# Altium PCB uku20710_com (1).PcbDoc (part 3 of 4)
Units mm, origin at the board's own origin, x right, y up, seen from the top; angles counter-clockwise.
Board outline 354.7 x 156.7 mm, 2 copper layers (Top Layer, Bottom Layer); 275 components, 514 nets, 980 pads, 578 vias.
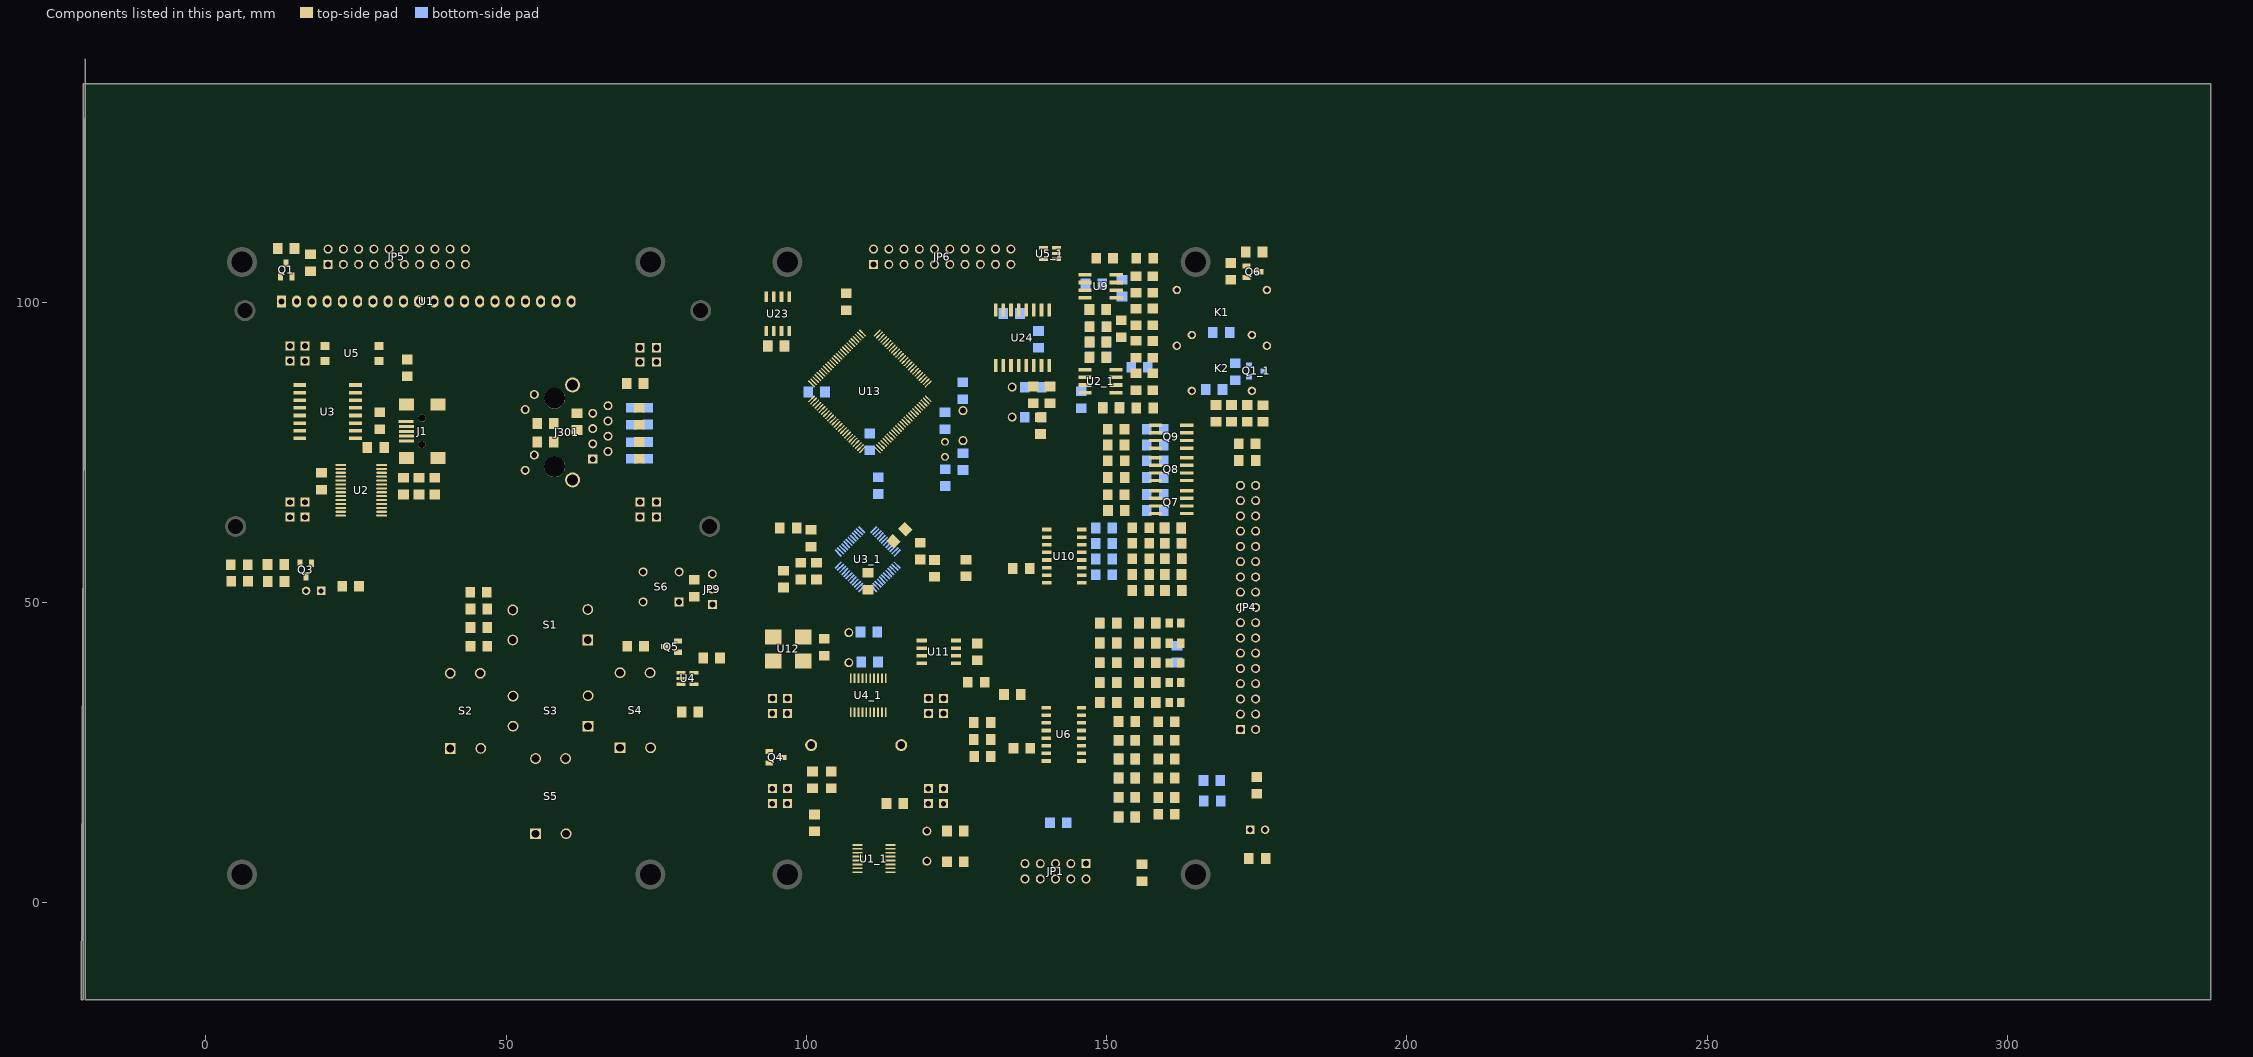
[diagram p3: the components of this part, seen from the top]

## Via types
v1: diameter 1.1, hole 0.6, Top Layer to Bottom Layer, 491 vias
v2: diameter 1.2, hole 0.7, Top Layer to Bottom Layer, 63 vias
v3: diameter 1.5, hole 1, Top Layer to Bottom Layer, 20 vias
v4: diameter 1.27, hole 0.7, Top Layer to Bottom Layer, 3 vias
v5: diameter 1.2, hole 0.6, Top Layer to Bottom Layer, 1 vias

## Nets (pads, with @x,y where several pads share a name; then routed paths per layer and width w, separated by ;. In a path a pad name is that pad's centre, name@x,y a point inside that pad or via, vN(x,y) a via of type N, cw(c..) or ccw(c..) an arc to the next point about the centre after c; other vN are vias at no path point) (continued)
copper on no net: | length 7030.1
  Top Layer w0.25: 93.319,95.201 93.319,96.997 v1(93.348,97.025) ; v2(93.598,27.958) 94.098,28.458 102.95,28.458 103.85,27.558 109.852,27.558 111.277,28.983 111.277,31.71 ; 94.322,34.001 94.322,34.534 95.248,35.46 104.45,35.46 v2(104.55,35.36) ; v2(94.348,65.618) 101.8,65.618 102.85,66.668 117.053,66.668 122.19,61.531 136.676,61.531 141.012,65.868 146.561,65.868 v1(146.811,66.118) ; v2(94.398,81.722) 98.66,81.722 100.852,83.914 ; 94.474,40.261 94.498,40.237 v1(94.498,38.261) ; 94.589,95.201 94.589,98.768 v1(94.698,98.876) ; v1(94.998,80.321) 95.248,80.321 95.798,80.871 98.517,80.871 101.205,83.56 ; v2(95.248,66.768) 95.848,66.168 101.6,66.168 102.65,67.218 117.304,67.218 122.51,62.011 136.477,62.011 141.584,67.118 v1(145.911,67.118) ; v1(95.425,48.999) 96.313,49.887 108.733,49.887 109.651,48.969 110.857,48.969 111.775,49.887 119.302,49.887 119.852,49.337 120.602,49.337 v1(121.602,50.337) ; v1@95.425,50.349 108.378,50.343 ; v1(95.598,64.567) 96.148,65.117 101.049,65.117 102.08,64.087 104.48,64.087 105.251,63.317 107.001,63.317 v1(107.451,63.767) ; v2(95.598,68.268) 96.248,67.618 96.248,67.068 96.598,66.718 101.45,66.718 102.45,67.718 117.504,67.718 122.731,62.491 136.114,62.491 139.759,66.136 139.759,67.618 140.359,68.218 v1(144.911,68.218) ; 95.859,100.901 95.859,99.691 96.248,99.302 v1@96.248,98.951 ; 96.196,55.149 v1(103.39,55.149) v1@103.402,55.137 ; v1(96.298,78.271) 97.365,78.271 101.912,82.818 ; v1(96.448,79.721) 98.073,79.721 101.559,83.207 ; 96.822,34.001 102.892,34.001 v2(103.35,34.46) ; v1(96.825,48.949) 97.313,49.437 108.575,49.437 109.472,48.539 111.035,48.539 111.933,49.437 119.102,49.437 119.702,48.837 121.502,48.837 v1(122.952,50.287) ; v1(96.948,76.97) 96.948,77.17 97.037,77.259 97.037,77.27 98.374,78.608 102.266,82.5 ; v2(97.098,69.819) 97.098,69.218 98.599,67.718 101.049,67.718 102.05,68.718 117.904,68.718 123.171,63.451 135.274,63.451 138.409,66.586 138.409,69.168 139.659,70.419 145.661,70.419 148.011,68.068 148.011,66.668 149.378,65.301 150.224,65.301 ; v2(97.198,67.768) 97.749,67.218 101.25,67.218 102.25,68.218 117.754,68.218 123.001,62.971 135.694,62.971 139.109,66.386 139.109,68.818 139.709,69.418 v1(143.91,69.418) ; v1(98.099,75.42) 98.793,75.42 101.624,78.251 103.674,78.251 105.094,79.671 ; v1(98.149,99.151) 98.424,98.875 98.424,97.471 99.544,96.351 100.082,96.351 105.448,90.985 ; v2(98.499,69.318) 99.399,68.418 100.949,68.418 101.75,69.218 118.154,69.218 123.321,64.051 134.894,64.051 136.575,65.733 137.811,66.968 137.811,69.371 139.459,71.019 145.911,71.019 148.985,67.945 150.162,67.945 ; v1(98.499,77.371) 98.499,78.025 102.62,82.146 ; v1(98.776,48.499) 99.241,48.963 108.401,48.963 109.264,48.101 v1(123.224,48.101) ; v1(99.049,74.47) 100.268,73.251 102.21,73.251 106.862,77.903 ; 99.059,53.824 99.059,53.48 100.252,52.287 ; 99.059,56.624 100.75,56.624 101.659,56.624 104.489,56.624 104.502,56.637 ; v1(99.199,73.069) 99.517,72.751 102.452,72.751 107.216,77.514 ; v1(99.199,100.151) 99.224,97.626 99.824,97.025 100.114,97.025 105.801,91.338 ; v1(100.399,98.126) 100.399,97.448 106.155,91.692 ; v1(100.724,78.851) 100.724,79.201 101.774,80.251 102.624,80.251 103.324,79.551 103.56,79.551 104.387,80.378 ; 100.724,88.638 101.912,87.449 102.649,86.713 102.649,85.251 102.849,85.051 ; v1@101.2,71.769 101.682,72.251 102.624,72.251 107.569,77.196 ; v1(101.374,74.151) 102.403,74.151 106.509,78.257 ; v1(101.374,76.251) 101.474,76.351 103.189,76.351 105.801,78.964 ; 101.702,59.306 101.702,59.337 ; v1(102.174,75.201) 102.746,75.201 106.155,78.61 ; v1(102.174,77.351) 103.482,77.351 105.448,79.318 ; v1(102.174,79.151) 102.424,78.901 103.617,78.901 104.741,80.025 ; 102.266,87.803 103.768,86.301 103.774,86.301 103.925,86.151 v1(104.8,86.151) ; v1(102.3,97.125) 102.3,96.502 105.451,93.351 105.91,93.351 106.862,92.399 ; v1(102.45,64.967) 102.8,64.617 104.15,64.617 105.15,65.618 106.07,65.618 106.251,65.437 v1@114.653,65.437 ; v1@102.5,71.069 102.9,71.469 103.85,71.469 104.25,71.069 105.15,71.069 105.668,70.551 117.574,70.551 123.074,65.051 v1(123.824,65.051) ; v1(102.95,70.119) v1(104.75,70.119) ; 103.327,81.439 104.099,82.211 104.099,83.251 ; v1(103.452,65.787) 103.852,66.187 ; 103.68,81.085 105.246,82.651 v1(105.274,82.651) ; v1@103.814,66.149 116.823,66.149 121.955,61.016 136.84,61.016 140.691,64.867 v1@143.96,64.867 ; v1@104.95,71.919 105.868,71.001 117.871,71.001 120.454,68.418 v2(121.155,68.418) ; v1@105,73.319 106.819,71.501 118.174,71.501 120.307,69.368 121.655,69.368 122.174,68.849 v1(122.174,67.301) ; v1(105.551,64.567) 105.851,64.867 113.853,64.867 114.453,64.267 115.653,64.267 v1@115.903,64.517 ; v1(106.501,47.663) 107.617,46.547 119.72,46.547 v1(120.154,46.113) ; 106.7,98.725 106.874,98.55 v1(106.874,96.901) 106.824,96.851 106.824,95.972 108.63,94.167 ; 106.7,101.576 106.65,101.576 106.602,101.528 105.249,100.175 105.249,96.84 108.276,93.813 109.674,92.415 v1(109.674,92.401) ; 107.051,39.969 108.027,38.993 108.027,37.41 ; 107.051,44.969 108.677,43.343 108.677,37.41 ; 107.923,76.843 108.801,77.721 108.801,79.571 v1(108.451,79.921) ; 107.923,93.46 108.55,92.832 108.55,91.373 ; v1(108.001,47.663) 108.501,47.163 121.605,47.163 v1(121.905,46.863) ; 108.276,76.489 109.007,77.219 110.25,77.219 110.624,77.593 110.624,77.619 ; 108.378,50.349 108.878,50.349 109.829,49.399 110.679,49.399 111.629,50.349 112.029,50.349 ; 108.63,76.136 107.501,75.007 107.501,72.769 108.301,71.969 118.354,71.969 120.504,69.819 121.897,69.819 123.105,68.61 v1(123.105,66.318) ; 108.983,75.782 108.051,74.85 108.051,72.969 108.551,72.469 118.604,72.469 120.806,70.268 122.056,70.268 123.755,68.568 123.755,67.068 125.156,65.668 v1(125.156,64.967) ; 110.246,52.149 110.279,52.116 v1@110.279,50.449 ; v1@110.628,102.176 v1(110.578,102.176) 112.978,99.775 113.729,99.775 114.639,98.865 114.639,94.166 113.58,93.106 ; v1(111.478,98.775) 111.928,99.225 113.479,99.225 113.923,98.78 114.179,98.525 114.179,94.374 113.929,94.124 ; 111.812,94.874 111.812,97.208 v1(111.828,97.224) ; v1@111.874,101.951 v1@111.874,102.101 ; 111.927,31.71 111.928,31.711 111.928,33.158 112.728,33.959 116.479,33.959 118.48,35.959 124.381,35.959 125.532,34.809 v1(128.482,34.809) ; v1(111.951,102.376) 111.951,101.603 113.279,100.275 114.029,100.275 115.069,99.235 115.069,93.914 114.529,93.374 ; 112.029,50.341 v1(120.252,50.337) ; 112.165,94.52 113.103,95.457 v1@113.103,96.025 ; 112.577,37.41 112.577,36.361 112.778,36.159 v1(115.979,36.159) ; 112.873,93.813 113.679,94.619 113.679,97.575 v1(112.978,98.275) ; v1(113.024,90.451) 113.046,90.451 114.64,92.045 ; 113.226,93.46 113.909,94.143 ; 113.227,37.41 113.328,37.51 v1(116.853,37.51) ; v1@113.324,101.901 115.499,99.726 115.499,93.594 115.179,93.273 ; 113.624,79.92 114.391,79.92 115.347,78.964 ; v1@113.702,63.887 113.702,63.087 116.84,59.949 118.946,59.949 ; 113.933,77.55 118.008,73.475 118.476,73.007 118.819,73.007 121.128,70.698 122.234,70.698 122.283,70.649 124.185,68.746 124.185,68.69 124.274,68.601 124.274,67.301 125.474,66.101 126.774,66.101 127.874,65.001 v1(133.924,65.001) ; 113.933,92.753 114.542,93.361 ; v1@114.029,13.103 v1(114.079,13.103) ; 114.124,92.251 114.28,92.406 ; 114.201,89.623 114.201,90.899 114.994,91.692 ; 114.287,77.903 118.212,73.978 ; 114.287,92.399 115.17,93.282 ; v1(114.524,81.201) 116.055,79.671 ; 114.64,78.257 119.03,73.867 119.315,73.867 121.583,71.599 122.727,71.599 125.224,69.101 125.224,67.701 125.874,67.051 127.274,67.051 128.174,66.151 132.674,66.151 133.224,66.701 v1@134.274,66.701 ; v1(114.774,102.151) 114.774,101.28 115.733,100.321 115.929,100.125 115.929,91.923 115.529,91.523 ; v1(114.779,32.958) 116.379,32.958 118.88,35.459 124.181,35.459 125.332,34.309 127.232,34.309 v1@128.182,33.358 ; 114.994,78.61 119.308,74.297 119.493,74.297 121.721,72.069 123.006,72.069 125.724,69.351 125.724,67.901 126.024,67.601 127.474,67.601 128.424,66.651 132.374,66.651 133.574,67.851 135.274,67.851 v1(136.074,68.651) ; 115.347,91.338 115.531,91.522 ; 115.701,79.318 116.524,78.494 116.524,78.301 115.924,77.701 ; 115.824,81.971 115.824,81.316 116.616,80.523 116.762,80.378 118.853,78.287 118.853,77.519 ; v1@115.879,39.857 119.205,39.857 ; v1(116.024,86.923) 116.574,86.373 118.867,86.373 119.59,87.096 ; v1(116.879,96.474) 117.33,96.924 119.23,96.924 119.474,96.68 119.474,92.637 ; v1(116.903,43.662) 116.908,43.667 119.205,43.667 ; 117.024,87.573 117.324,87.273 117.646,87.273 118.529,88.156 ; 117.115,80.732 121.524,76.322 121.524,75.701 122.976,74.25 123.074,74.25 123.079,74.25 ; 117.469,81.085 122.024,76.53 122.024,75.951 122.524,75.451 123.374,75.451 124.124,74.701 124.124,74.101 126.337,71.889 127.207,71.019 129.939,71.019 131.14,69.819 v1(131.957,69.819) ; 117.822,81.439 122.511,76.75 123.074,76.75 123.079,76.75 ; 118.176,81.792 122.148,77.821 123.505,77.821 124.074,77.251 124.074,75.401 124.976,74.5 126.557,72.918 v1(127.932,72.918) ; 118.204,73.97 118.737,73.437 119.137,73.437 121.405,71.169 122.407,71.169 124.724,68.851 124.724,67.501 125.674,66.551 127.024,66.551 127.974,65.601 133.024,65.601 133.424,66.001 134.274,66.001 134.424,65.851 135.474,65.851 v1@135.974,66.351 ; v1@118.324,98.751 118.874,98.751 119.174,98.451 ; 118.529,82.146 122.405,78.271 123.755,78.271 124.505,77.521 124.505,75.77 125.557,74.719 127.832,74.719 v1(128.032,74.519) ; 118.794,108.841 120.074,107.561 120.074,101.151 122.574,98.651 v1@122.574,91.251 ; 118.883,82.5 122.631,78.751 124.024,78.751 124.974,77.801 124.974,76.001 125.474,75.501 v1(142.474,75.501) ; 119.237,82.853 122.838,79.251 124.274,79.251 126.075,77.451 126.075,76.943 ; 119.237,87.449 121.438,89.651 124.074,89.651 v1(124.374,89.951) ; 119.59,83.207 120.853,81.943 126.075,81.943 ; 119.944,86.742 119.254,86.053 119.254,85.573 119.504,85.323 120.404,85.323 123.155,88.073 v1(123.155,88.173) ; 120.297,83.914 120.346,83.914 124.806,88.373 124.806,88.422 125.704,88.422 v1(126.605,89.322) ; 120.297,86.389 122.103,88.195 122.103,88.922 122.254,89.072 124.804,89.072 125.304,89.573 125.304,89.823 126.355,90.873 126.705,90.873 v1@126.905,90.873 ; 121.334,106.301 121.334,101.172 v1(122.281,100.225) ; v1@123.581,96.874 123.924,96.874 124.474,97.425 124.474,100.382 122.974,101.882 122.974,102.819 126.435,106.28 126.482,106.327 ; v1@123.774,95.251 123.799,95.276 125.074,96.551 125.074,96.651 ; v1(124.624,54.351) 124.637,54.339 126.562,54.339 126.881,54.339 ; v1(124.974,94.351) 125.674,95.051 125.674,95.851 ; v1(126.682,70.018) 127.232,69.467 130.783,69.467 131.833,68.417 v1(131.833,67.917) ; v1(126.932,68.567) 130.233,68.567 v1(130.533,68.267) ; v1(127.824,98.801) 127.824,92.601 127.71,92.486 127.71,92.385 127.674,92.349 127.674,78.801 128.324,78.151 v1@128.624,78.151 ; v1(128.474,100.051) 128.774,99.751 128.774,97.951 128.474,97.651 128.474,92.451 128.174,92.151 128.174,80.001 v1(128.624,79.551) ; v1(129.124,91.301) 129.124,80.601 v1(130.574,79.151) ; v2(129.207,45.801) v2@129.307,45.801 ; v1(129.274,58.451) 130.624,59.801 v1@138.274,59.801 ; v2@129.318,45.813 130.407,45.813 ; v1(130.274,5.301) 133.809,5.301 133.908,5.202 140.24,5.202 141.481,3.961 ; 130.407,45.801 136.774,45.801 137.174,46.201 139.824,46.201 139.974,46.051 v1@143.76,46.051 ; v1(130.557,101.927) 130.174,101.544 130.174,94.324 131.529,92.969 131.529,89.426 ; v1(131.324,87.051) 131.324,81.651 v1(132.374,80.601) ; v1@131.774,69.801 134.366,69.801 134.613,70.047 136.856,70.047 138.731,71.922 ; v1(132.624,101.877) 132.799,101.701 132.799,98.676 132.799,96.633 v1(133.258,96.175) ; 132.774,98.676 132.774,99.201 ; v1@133.891,68.851 v1(134.024,68.851) 134.791,69.617 137.185,69.617 139.335,71.768 v1@140.836,71.768 ; v1(135.258,94.725) 135.324,94.725 135.339,94.709 135.339,89.426 ; 135.339,98.676 135.339,102.458 v1(135.608,102.727) ; v1(135.724,57.766) 136.758,57.766 137.859,58.866 138.709,58.866 139.459,59.616 139.959,59.616 ; 135.784,34.709 135.758,33.509 v1(136.558,32.709) 139.319,29.949 139.954,29.949 ; v1(136.408,95.825) 136.609,95.624 136.609,89.426 ; 138.735,71.918 139.834,73.018 141.587,73.018 142.085,72.519 v1(143.01,72.519) ; 139.954,31.219 139.972,31.201 141.702,31.201 v1@141.76,31.259 ; 139.954,32.489 139.954,33.481 v1@139.974,33.501 ; 139.999,54.526 141.698,54.526 v1(141.724,54.5) ; 139.999,62.146 140.609,62.756 v1(140.609,63.217) ; v1(142.674,90.851) 142.674,80.451 141.874,79.651 141.874,78.101 142.524,77.451 v1(144.024,77.451) ; v1(142.91,55.815) 142.929,55.796 145.849,55.796 ; v1(143.924,73.701) 150.105,73.701 150.212,73.595 ; v1(145.674,78.901) 147.005,77.571 148.962,77.571 150.162,78.771 150.162,78.845 ; 145.849,53.256 151.07,53.256 v1(152.362,51.964) ; v1(146.774,76.351) 150.056,76.351 ; v1(147.711,78.921) 149.112,80.321 153.163,80.321 ; v1(147.724,31.601) 153.971,31.601 154.763,30.809 154.763,30.259 154.82,30.201 154.877,30.145 158.562,30.145 158.564,30.146 158.564,30.159 ; 150.162,78.851 150.174,78.851 ; 153.163,80.301 158.974,80.301 160.563,81.89 160.563,83.121 ; 154.324,30.051 154.779,30.051 ; v1(159.924,86.551) 159.924,85.212 160.664,84.472 160.664,83.222 160.563,83.121 ; 160.563,83.171 160.563,83.121
  Top Layer w0.3: v2(93.298,85.072) 98.999,90.774 98.999,95.725 97.129,97.595 97.129,100.901 ; v2(93.748,83.572) 94.698,84.522 94.698,85.573 99.599,90.474 99.599,94.378 100.827,95.606 ; 93.774,25.106 96.024,27.357 v1(97.124,27.357) ; v2(93.798,36.36) 105.651,36.36 v2(105.751,36.46) ; v2(94.898,29.408) 110.252,29.408 110.627,29.783 110.627,31.71 ; v1@97.124,98.226 v1@97.129,98.231 ; v1(97.776,59.651) 98.811,60.687 v1(103.152,60.687) ; v1(97.825,21.855) 97.825,21.805 97.862,21.843 104.133,21.843 ; 98.376,62.352 98.376,62.402 98.376,62.802 v1(99.676,64.103) ; 99.059,53.824 99.059,53.48 99.059,53.367 101.126,51.299 103.027,51.299 103.227,51.299 v1@103.327,51.399 ; v1@99.702,63.687 99.897,63.882 100.052,64.037 101.487,64.037 101.891,63.632 103.306,63.632 104.852,62.087 107.002,62.087 107.752,62.837 110.452,62.837 111.402,63.787 v1(111.952,63.787) ; 100.726,56.601 100.75,56.624 100.776,56.651 100.776,59.251 ; 101.659,53.824 102.233,53.25 v1(103.577,53.25) ; v2@103.405,9.258 v2(103.35,9.203) 105.576,9.203 106.451,8.328 108.477,8.328 ; 104.133,19.043 109.666,19.043 112.578,21.955 131.883,21.955 133.457,20.382 v1(135.934,20.382) ; v2(105,8.003) 105.876,8.003 106.201,7.678 108.477,7.678 ; v2(105.601,30.759) 106.251,30.109 108.951,30.109 109.327,30.484 109.327,31.71 ; v2@105.836,6.718 v2(105.801,6.753) 106.076,7.028 108.477,7.028 ; 105.972,38.66 105.972,38.109 106.671,37.41 107.377,37.41 ; 106.527,5.751 107.154,6.378 110.501,6.378 110.528,6.351 ; 108.477,8.978 106.851,8.978 105.727,10.103 105.727,11.653 107.177,13.103 v1@114.029,13.103 ; 108.477,9.628 111.051,9.628 112.351,8.328 114.027,8.328 ; 111.902,5.078 115.252,5.078 115.579,4.751 ; 112.577,31.71 112.577,30.209 v1(112.878,29.907) 113.229,30.258 113.229,31.708 113.227,31.71 ; v1(112.678,20.405) 113.579,21.305 129.083,21.305 v1(129.683,20.705) ; v1(113.728,51.248) 113.728,51.413 114.677,52.362 115.052,52.737 116.59,54.274 121.309,54.274 ; 113.972,4.201 114.027,4.257 114.027,5.078 ; 114.027,5.728 115.628,5.728 118.754,2.602 142.661,2.602 143.986,3.926 143.986,3.951 143.936,3.951 ; 114.027,7.028 115.803,7.028 119.079,3.752 136.192,3.752 136.401,3.961 ; 114.027,7.678 116.553,7.678 119.479,4.752 127.756,4.752 129.505,6.501 136.401,6.501 ; 114.027,8.978 117.987,8.978 120.03,6.934 120.013,6.934 ; 114.027,9.628 115.955,9.628 118.237,11.911 120.054,11.911 ; 115.701,90.985 116.974,92.258 v1(116.952,93.373) ; 116.055,90.631 117.924,92.501 v1@117.924,94.151 ; 116.254,106.301 116.254,104.171 122.024,98.401 122.024,92.358 118.176,88.51 ; 116.408,90.278 118.874,92.744 118.874,95.251 118.652,95.473 v1@118.524,95.601 ; 116.762,89.924 119.474,92.637 ; 117.115,89.571 120.124,92.58 120.124,97.501 119.174,98.451 ; 117.469,89.217 120.724,92.473 120.724,97.751 118.474,100.001 v1@117.924,100.001 ; 117.822,88.863 121.374,92.416 121.374,98.101 115.024,104.451 115.024,107.301 115.374,107.651 117.444,107.651 118.794,106.301 ; 118.883,87.803 121.281,90.201 123.232,90.201 123.904,90.873 125.554,90.873 127.255,92.573 127.255,98.075 126.874,98.455 126.874,101.301 129.224,103.651 133.474,103.651 135.524,105.701 135.524,107.251 135.174,107.601 125.114,107.601 123.874,108.841 ; 119.944,83.56 120.553,82.951 122.924,82.951 v1(123.524,83.551) ; v1(123.581,99.625) 123.574,100.351 121.974,101.951 121.974,104.401 123.874,106.301 ; v1(123.904,93.173) 125.124,93.173 126.274,94.324 126.274,101.851 128.674,104.251 131.984,104.251 134.034,106.301 ; 125.074,96.651 125.074,102.421 128.954,106.301 ; 125.674,95.851 125.674,102.051 128.424,104.801 129.994,104.801 131.494,106.301 ; v1(125.824,79.151) 128.924,76.051 ; 128.906,76.07 134.506,76.07 ; v1(131.357,32.909) 133.358,30.909 v1(136.508,30.909) ; 134.058,98.676 v1@134.058,100.976 ; 134.524,76.051 v1(134.924,76.451) ; v1(136.058,52.564) 136.458,52.164 142.324,52.164 v1(142.874,52.714) ; 139.999,58.336 141.789,58.336 v1(141.86,58.266) ; 139.999,60.876 v1@142.95,60.876 ; v1(141.91,63.717) 144.287,63.717 145.487,64.916 147.312,64.916 149.805,62.423 v1(152.362,62.423) ; v1@144.024,85.251 144.989,86.216 146.374,86.216 ; v1(144.911,72.669) 147.011,72.669 148.886,70.795 150.212,70.795 ; 145.849,58.336 146.982,58.336 148.561,59.916 v1(152.362,59.916) ; 145.911,54.515 152.212,54.515 v1(152.362,54.665) ; v1(152.362,57.265) 152.162,57.065 145.85,57.065 ; 163.491,17.504 163.541,17.554 v1(163.541,18.255) ; 145.849,57.066 145.85,57.065
  Top Layer w0.4: v1(92.574,90.051) 92.174,90.451 92.174,97.851 94.589,100.266 94.589,100.901 ; v2(92.597,86.973) 92.597,87.723 94.948,90.074 94.948,93.925 94.589,94.283 94.589,95.201 ; 93.024,92.901 93.377,92.548 93.824,92.101 v1@93.824,91.151 ; 94.322,16.501 96.822,16.501 v1@111.075,16.501 ; 95.824,92.851 95.859,92.886 95.859,95.201 ; v1(98.725,14.704) 117.68,14.704 118.08,15.104 132.283,15.104 v1(132.583,15.404) ; v1(99.275,24.006) 99.619,24.349 111.435,24.349 112.278,23.506 125.238,23.506 126.082,24.349 127.92,24.349 ; v1(99.625,32.908) 104.126,32.908 106.327,35.109 116.529,35.109 118.123,36.703 126.87,36.703 ; v1(99.625,38.11) 99.625,40.26 102.076,40.26 102.976,41.16 ; v2(105,8.003) v2@105.016,7.988 ; 110.228,51.548 110.246,51.566 110.246,52.149 ; v1(111.178,22.656) 133.834,22.656 134.777,23.599 139.954,23.599 ; 116.254,108.841 117.764,110.351 135.574,110.351 136.374,109.551 136.374,105.251 134.174,103.051 129.724,103.051 129.424,102.751 129.424,93.901 130.074,93.251 130.074,81.201 v1(130.724,80.551) ; 119.205,41.127 121.289,41.127 123.805,38.611 v1(137.309,38.611) ; 124.905,41.127 126.291,41.127 127.053,40.364 128.453,40.364 ; 124.905,42.397 126.341,42.397 127.156,43.212 128.456,43.212 ; v1(126.706,50.364) 126.706,50.314 126.756,50.264 143.337,50.264 144.036,50.963 144.486,50.963 ; v1(127.806,49.063) 128.106,49.363 143.437,49.363 143.937,49.864 151.262,49.864 152.062,49.063 169.217,49.063 170.379,47.901 173.545,47.901 174.814,49.171 174.794,49.171 ; 129.733,36.709 129.733,38.61 ; 130.683,24.256 130.694,24.267 130.694,27.201 ; 132.574,34.392 v1@132.574,36.009 ; 132.574,35.343 132.807,35.11 ; v1(134.824,17.751) v1(148.124,17.751) ; v1(135.574,21.901) 142.06,21.901 143.46,23.301 143.46,24.757 144.842,26.139 145.804,26.139 ; 137.309,54.168 137.309,54.265 ; 137.343,55.281 137.343,53.878 v1@138.006,53.214 ; 137.724,83.151 137.737,83.164 137.768,83.164 137.774,83.164 ; 137.768,85.964 137.768,87.395 137.879,87.506 137.879,89.426 137.879,93.395 139.408,94.924 140.858,94.924 141.408,95.474 ; v1@138.209,53.214 139.984,53.219 ; 139.149,89.272 139.149,89.426 139.149,93.765 139.658,94.274 141.908,94.274 142.824,93.358 v1(145.311,93.358) 147.137,93.358 ; 139.954,27.409 141.061,27.409 v1(142.11,28.458) ; 140.308,92.523 140.358,92.523 140.419,92.462 140.419,89.426 140.419,89.372 ; 140.419,98.676 140.419,97.156 140.424,97.151 ; 140.624,83.151 141.474,83.151 141.974,83.651 141.974,87.051 141.674,87.351 141.674,91.874 v1@141.674,91.951 ; 141.428,95.455 141.924,95.951 145.261,95.925 147.187,95.904 147.771,95.904 147.824,95.851 ; v1(142.51,29.959) 143.11,29.959 144.39,28.679 145.804,28.679 ; v5@143.61,27.658 143.61,27.608 143.809,27.409 145.804,27.409 ; 144.486,50.964 151.562,50.964 152.662,49.864 171.582,49.864 172.274,49.171 ; v1(148.124,28.501) 153.72,28.501 154.975,27.246 155.163,27.058 v1(156.663,27.058) 158.549,27.058 158.562,27.045 ; 149.912,90.795 150.642,91.524 151.662,91.524 152.212,91.524 152.973,90.764 154.868,90.764 ; 149.987,95.908 150.018,95.908 150.031,95.908 151.345,95.908 152.362,96.925 ; v1(152.012,90.024) 152.012,89.194 151.574,88.756 152.079,88.756 ; 152.424,105.051 152.474,105.051 ; 164.18,94.541 164.18,85.241 164.18,85.196 164.224,85.151 ; v1(169.324,87.651) 169.324,100.101 170.617,101.394 170.617,103.727 170.617,103.751 ; 172.26,49.171 172.267,49.163
  Top Layer w0.5: v1@92.497,102.727 92.547,102.677 93.319,101.905 93.319,100.901 ; 96.022,24.204 97.023,24.204 99.025,26.207 100.775,26.207 ; 101.652,62.187 101.702,62.137 102.552,62.137 v1(102.602,62.187) ; v1(112.778,18.054) 112.778,17.068 113.334,16.513 ; v1@115.779,13.753 118.28,13.753 118.68,14.154 145.337,14.154 v1(146.537,12.953) ; 116.079,16.554 116.093,16.554 116.146,16.501 120.322,16.501 ; 120.054,11.911 123.368,11.911 123.418,11.961 ; 120.162,6.803 123.405,6.803 ; 120.304,19.006 120.322,19.023 120.322,19.473 121.355,20.506 125.331,20.506 v1(125.582,20.255) ; 120.322,31.501 120.322,30.741 121.055,30.009 127.856,30.009 ; 122.805,19.006 v2@126.706,19.006 ; v2@122.812,27.201 127.894,27.201 ; 122.822,16.501 127.502,16.501 128.706,17.705 130.107,17.705 v2(130.507,17.305) ; v2@122.855,27.201 v2(122.855,27.208) ; v2@126.706,19.006 v2(126.756,18.956) ; 130.694,27.201 131.2,27.201 v2(132.557,28.558) 131.157,29.959 130.707,29.959 ; v1(132.207,51.314) 143.21,51.314 144.16,52.264 v1(148.162,52.264) ; 132.799,89.426 132.799,82.334 134.274,80.859 ; 134.069,89.426 134.069,86.064 134.274,85.859 ; v1(136.574,79.001) 138.427,80.854 138.971,80.854 ; v1(137.335,23.656) 137.335,25.355 ; 137.774,83.101 137.802,83.129 137.837,83.164 139.024,83.164 ; v1(138.159,28.658) 139.926,28.658 139.947,28.679 ; v1(139.024,44.851) 150.124,44.851 151.697,43.279 151.724,43.251 151.679,43.253 ; 139.074,80.801 139.074,80.854 139.074,83.114 139.024,83.164 ; 139.149,89.426 139.149,87.626 140.568,86.208 140.568,85.964 ; 139.149,98.676 139.174,98.701 ; 139.249,107.151 139.366,107.034 140.374,106.026 140.374,98.676 140.374,98.651 140.394,98.651 140.419,98.676 ; v1(139.924,19.251) 139.974,19.201 154.368,19.201 154.863,18.706 154.863,17.558 154.863,17.555 154.874,17.545 156.663,17.545 158.562,17.545 ; 139.924,28.701 139.947,28.679 ; 139.954,24.869 139.924,24.901 139.954,24.901 141.566,24.901 v1(141.81,24.657) ; 139.954,28.679 139.947,28.679 ; 140.568,83.164 139.024,83.164 ; 141.024,26.101 139.992,26.101 139.954,26.139 141.641,26.139 v1(141.71,26.208) ; 141.399,107.151 141.574,107.151 141.604,107.122 141.974,106.751 144.074,106.751 ; 141.399,108.101 141.633,108.101 v1@142.824,108.101 ; 141.399,109.051 141.624,109.051 ; v1(141.424,15.951) 141.474,15.901 154.017,15.901 154.763,15.155 154.763,14.258 154.763,14.245 154.787,14.245 156.663,14.245 v1@157.112,14.245 ; 141.629,109.055 141.974,109.401 144.274,109.401 ; v1(141.724,47.001) 141.974,47.251 143.886,47.251 144.736,48.101 150.324,48.101 151.774,46.651 151.865,46.56 153.024,46.56 153.033,46.551 153.513,46.551 155.37,46.56 ; v1(142.724,20.801) 148.324,20.801 149.874,22.351 154.118,22.351 155.249,21.22 155.725,20.745 v1(156.663,20.745) 158.562,20.745 ; v1(142.874,41.651) 142.924,41.601 150.019,41.601 151.669,39.951 ; 143.974,3.914 143.986,3.926 144.021,3.961 ; 144.274,102.019 146.385,102.019 ; v1(144.66,22.257) 144.21,22.707 144.21,24.437 144.624,24.851 144.642,24.869 145.804,24.869 ; v1(144.774,38.251) 144.824,38.301 150.005,38.301 151.662,36.645 151.675,36.658 153.513,36.658 155.37,36.66 ; v1(144.824,35.051) 144.874,35.001 150.005,35.001 151.662,33.345 151.675,33.358 v1(153.513,33.358) 155.37,33.36 ; 145.804,23.599 145.804,23.601 147.624,23.601 149.524,25.501 153.969,25.501 154.813,24.657 ; 145.874,98.651 145.874,98.626 145.874,98.601 146.93,98.601 147.062,98.733 ; 146.374,87.451 148.474,87.451 ; 146.374,103.301 146.385,103.301 147.774,103.301 148.774,102.301 148.774,100.445 147.137,98.808 147.062,98.733 ; 149.224,82.451 148.474,83.201 v1(148.474,84.051) 148.474,87.451 ; 149.324,82.401 150.824,80.901 153.43,80.901 154.937,82.408 ; 149.874,93.351 148.524,92.001 148.524,89.651 148.474,89.601 148.474,87.451 ; 150.124,96.001 150.031,95.908 150.024,95.901 150.018,95.908 150.002,95.923 147.192,98.733 147.137,98.733 147.062,98.733 ; 150.468,95.908 150.487,95.908 ; 150.47,98.641 150.78,98.951 v1(152.274,98.951) 153.374,98.951 ; 150.474,90.851 150.474,90.801 150.19,90.517 149.574,89.901 149.574,88.201 150.289,87.486 151.574,87.486 ; v1(150.638,3.951) 150.638,4.701 151.238,5.301 ; 151.25,5.29 154.511,8.551 158.313,8.551 159.414,9.652 163.714,9.652 166.213,12.151 173.886,12.151 173.974,12.151 ; 151.585,102.019 152.807,102.019 153.374,101.451 153.374,98.951 ; 151.585,104.559 151.894,104.559 v1(153.063,105.728) ; 151.662,43.245 153.018,43.245 153.024,43.251 v1(153.513,43.251) 155.374,43.251 154.387,43.258 ; 152.962,76.245 154.268,76.245 154.274,76.251 154.474,76.051 154.524,76.001 154.574,75.951 154.829,75.696 154.874,75.696 158.124,75.696 ; 152.962,78.845 154.274,78.845 ; 153.012,67.995 153.019,68.001 154.324,68.001 154.499,67.826 154.549,67.776 154.599,67.726 154.984,67.341 158.136,67.341 ; 153.012,70.795 154.324,70.795 154.499,70.62 154.549,70.57 154.599,70.52 154.823,70.296 154.874,70.296 158.124,70.296 ; 153.012,73.595 154.318,73.595 154.324,73.601 154.503,73.423 154.603,73.323 155.089,72.836 158.124,72.836 ; 153.024,65.301 154.324,65.301 154.513,65.112 154.563,65.062 154.613,65.012 154.824,64.801 154.874,64.801 158.136,64.801 ; 154.274,78.801 154.274,78.845 ; 154.387,39.958 155.374,39.951 v1(153.513,39.951) 151.669,39.951 ; 154.868,93.564 154.874,93.551 154.874,93.451 157.574,90.751 157.678,90.751 159.474,90.751 v1(159.674,90.951) ; 154.874,101.551 154.874,101.601 153.187,103.289 151.585,103.289 149.587,103.289 149.374,103.501 149.374,104.951 151.059,106.636 151.059,107.325 151.083,107.301 154.874,107.301 154.937,107.308 ; 154.874,104.351 154.874,104.301 157.574,101.601 157.678,101.601 159.424,101.601 v1(159.474,101.551) ; 154.881,85.339 154.874,85.401 154.881,85.401 154.924,85.401 157.674,88.151 ; 154.881,88.139 154.762,88.139 152.839,86.216 151.574,86.216 149.739,86.216 149.474,85.951 149.474,84.751 151.774,82.451 152.024,82.451 152.074,82.401 152.074,82.404 152.074,82.451 152.077,82.454 153.524,83.901 156.674,83.901 157.674,82.901 157.674,82.408 157.674,82.401 ; 154.881,96.139 154.881,97.008 155.474,97.601 156.374,97.601 157.699,98.926 157.774,99.001 158.64,99.001 161.68,102.041 162.485,102.041 167.968,96.558 167.968,82.864 ; 154.881,98.939 154.874,98.951 153.374,98.951 ; 154.963,23.957 156.657,23.957 v1(156.663,23.951) ; 155.018,24.189 155.107,24.101 ; v1@156.363,14.205 156.663,14.205 158.02,14.205 158.562,14.747 ; v1@156.663,23.945 158.562,23.945 ; 157.068,57.274 159.705,57.274 ; 157.068,59.875 159.605,59.875 159.664,59.816 ; 157.07,54.671 157.064,54.665 159.614,54.665 ; 157.076,51.921 157.119,51.964 v1(158.414,51.964) 158.457,52.008 159.702,52.008 ; 157.12,62.423 159.627,62.423 ; 157.187,33.358 157.202,33.373 157.231,33.345 158.187,33.345 159.962,33.345 160.197,33.11 161.555,31.751 164.308,31.751 165.366,32.809 165.366,34.51 166.516,35.66 166.516,37.51 168.017,39.011 172.274,39.011 ; 157.187,36.658 158.187,36.658 159.949,36.658 159.962,36.645 160.197,36.41 161.605,35.001 164.507,35.001 165.616,36.11 165.616,37.961 167.956,40.301 173.524,40.301 174.814,39.011 ; 157.187,39.958 157.187,39.945 158.187,39.945 159.962,39.945 160.197,39.71 161.605,38.301 164.606,38.301 167.906,41.601 172.274,41.601 172.274,41.551 ; 157.187,43.258 157.2,43.245 158.187,43.245 159.962,43.245 160.216,42.99 161.605,41.601 166.506,41.601 167.706,42.801 173.564,42.801 174.814,41.551 ; 157.187,46.558 157.193,46.551 158.187,46.551 159.974,46.551 160.175,46.35 160.346,46.18 161.624,44.901 167.674,44.901 168.484,44.091 172.274,44.091 ; 157.674,88.151 158.874,88.151 161.68,90.957 161.68,92.741 ; 158.124,78.236 154.939,78.236 154.624,78.551 154.574,78.601 154.524,78.651 154.331,78.845 154.274,78.845 ; v1(158.364,57.265) v1@158.364,57.274 ; v1@158.364,59.875 v1(158.364,59.916) ; 161.362,14.747 162.62,14.747 170.124,22.251 170.124,29.301 172.214,31.391 172.274,31.391 ; 161.362,17.545 163.918,17.545 169.075,22.701 169.074,30.451 171.274,32.651 173.554,32.651 174.814,31.391 ; 161.362,20.745 165.218,20.745 168.024,23.551 168.024,30.567 168.767,31.309 168.767,31.659 169.317,32.209 ; 161.362,23.945 164.768,23.945 167.024,26.201 167.024,30.967 167.816,31.759 167.816,32.409 168.266,32.859 ; 161.362,27.045 163.918,27.045 165.253,28.379 166.024,29.151 166.024,31.217 166.966,32.159 166.966,33.209 168.667,34.91 168.667,35.91 168.992,36.235 169.228,36.471 172.274,36.471 ; 161.362,30.145 163.868,30.145 166.17,32.447 166.17,34.014 167.466,35.31 167.466,36.96 168.257,37.751 173.534,37.751 174.814,36.471 ; 162.434,62.417 162.427,62.423 165.009,62.423 170.641,56.791 172.274,56.791 ; 162.465,54.615 168.316,54.615 169.917,53.014 173.511,53.014 174.814,51.711 ; 162.465,59.916 165.916,59.916 170.317,55.515 173.551,55.515 174.815,54.251 ; 162.477,57.272 163.409,57.272 164.916,55.765 168.516,55.765 170.03,54.251 172.274,54.251 ; 162.502,52.008 163.972,52.008 164.268,51.711 172.275,51.711 ; 163.324,71.566 163.324,70.296 163.327,70.299 163.374,70.251 164.524,70.251 165.174,69.601 165.174,68.301 ; 163.324,74.106 163.324,72.836 163.389,72.901 164.474,72.901 165.074,72.301 165.074,71.051 166.324,69.801 166.324,68.101 167.524,66.901 167.524,65.551 171.204,61.871 172.274,61.871 ; 163.324,75.696 163.324,75.701 ; 163.324,76.966 163.324,75.701 ; 163.324,79.506 163.324,78.236 163.317,78.244 163.274,78.201 163.324,78.201 164.624,78.201 165.024,77.801 165.024,77.501 166.124,76.401 166.124,73.801 167.074,72.851 167.074,71.501 168.224,70.351 168.224,68.951 169.574,67.601 169.574,66.451 171.614,64.411 172.274,64.411 ; 163.336,66.071 163.336,64.801 163.336,64.789 164.236,64.789 ; 163.336,68.611 163.336,67.341 163.348,67.351 164.624,67.351 165.424,66.551 165.424,65.201 170.274,60.351 170.274,60.151 171.094,59.331 172.274,59.331 ; 163.824,64.901 163.824,64.851 164.624,64.851 169.374,60.101 169.374,59.251 170.574,58.051 173.554,58.051 174.814,56.791 ; 165.224,69.401 165.224,67.901 166.474,66.651 166.474,65.351 171.224,60.601 173.544,60.601 174.814,59.331 ; 168.21,80.084 168.21,76.627 171.217,73.62 172.018,73.62 172.018,69.748 172.274,69.491 172.524,69.741 ; 168.275,32.851 170.624,35.201 173.544,35.201 174.814,33.931 ; 168.967,36.26 168.972,36.255 168.972,36.215 ; 169.325,32.201 171.054,33.931 172.274,33.931 ; 170.667,106.477 173.156,106.477 ; 170.768,80.064 170.768,78.377 172.587,76.558 ; 170.768,82.864 170.768,92.695 v1(170.824,92.751) ; v1(172.374,91.551) 172.374,84.057 173.568,82.864 ; 172.424,73.501 172.524,73.401 ; 172.924,109.885 172.924,109.929 ; 173.156,108.384 173.156,106.064 173.194,106.027 ; 173.568,80.064 173.524,80.101 173.524,80.064 173.524,79.151 175.374,77.301 175.374,76.558 175.387,76.558 ; 173.674,7.401 173.974,7.701 173.974,12.143 173.974,12.151 ; 174.18,85.241 173.674,85.746 173.674,94.035 174.18,94.541 174.374,94.735 174.374,103.157 175.492,104.274 175.492,105.075 ; 174.814,61.871 173.534,63.151 171.374,63.151 168.574,65.951 168.574,67.101 167.224,68.451 167.224,70.201 166.174,71.251 166.174,72.401 165.174,73.401 165.174,75.351 164.824,75.701 163.324,75.701 ; 174.814,69.491 174.814,73.616 174.818,73.62 175.618,73.62 176.368,74.37 176.368,79.721 176.018,80.072 ; 174.814,73.091 175.374,73.651 175.674,73.651 ; 174.981,18.139 173.974,17.132 173.974,12.151 ; 176.374,80.051 176.374,80.101 176.4,80.076 ; 176.374,82.851 176.374,90.251 175.074,91.551 175.074,93.351 176.68,94.957 176.68,102.041 ; 151.669,39.951 151.662,39.945 151.669,39.951
  Top Layer w0.6: v1@113.252,57.186 113.202,57.186 113.152,57.186 113.202,57.137 118.946,57.137 121.309,57.137 ; 118.531,57.201 126.562,57.201 128.805,57.201 v1(132.374,57.201) v1@132.474,57.201 ; v1(137.824,48.201) 143.586,48.201 144.286,48.901 150.656,48.901 151.356,48.201 161.124,48.201 162.525,46.8 162.724,46.601 162.774,46.601 v1(164.274,46.601) 164.974,46.601 165.674,45.901 168.724,45.901 169.424,46.601 172.274,46.601 172.324,46.601 ; 162.762,36.645 v1(164.368,36.645) ; 162.762,43.245 v1(164.368,43.245) ; 162.774,39.901 164.324,39.901 v1(164.374,39.951) ; 162.824,33.301 v1@163.824,33.301 ; 169.143,16.804 169.143,16.701 v1(170.493,15.351)
  Top Layer w0.8: v1(132.574,10.751) 143.863,10.751 v1(143.96,10.654) ; v1(143.074,78.701) 143.574,79.201 143.574,85.272 143.574,89.851 144.274,90.551 v1@144.274,91.274 ; v1(143.41,97.326) 143.31,97.426 143.31,100.376 144.274,101.341 144.274,106.692 144.759,107.177 144.759,109.177 144.236,109.7 v1(144.236,110.078)
  Top Layer w1: 146.561,3.961 147.77,3.961 153.66,9.851 157.162,9.851 158.164,10.853 163.214,10.853 163.965,11.604 174.814,22.453 174.814,28.851 ; 146.561,6.501 151.911,11.851 156.662,11.851 157.314,12.503 162.414,12.503 172.274,22.364 172.274,28.801 ; 155.839,6.452 157.39,6.452 v1(157.44,6.502) ; v1@156.89,12.153 156.89,12.103 v1(156.94,12.053)
  Bottom Layer w0.25: v1(93.348,97.025) 93.398,97.075 96.098,97.075 96.548,96.625 101.8,96.625 v1(102.3,97.125) ; 93.998,62.967 93.998,38.761 v1(94.498,38.261) ; 93.998,62.967 v1(95.598,64.567) 99.499,68.468 99.499,70.369 97.699,72.169 97.699,75.02 v1(98.099,75.42) ; v2(94.348,65.618) 94.048,65.918 94.048,81.372 v2(94.398,81.722) ; v1(94.998,80.321) 94.648,79.971 94.648,67.368 v2(95.248,66.768) ; v2(95.598,68.268) 95.298,68.568 95.298,79.121 95.898,79.721 v1(96.448,79.721) ; v1(96.298,78.271) 95.948,77.921 95.948,69.569 97.198,68.318 v2(97.198,67.768) ; v1(96.948,76.97) 96.598,76.62 96.598,70.319 v2(97.098,69.819) ; v2(98.499,69.318) 98.499,70.519 97.148,71.869 97.148,75.77 98.499,77.12 v1(98.499,77.371) ; v1(101.374,74.151) 103.019,74.151 103.5,73.67 103.5,72.519 103.85,72.169 103.85,67.468 102.45,66.068 v1(102.45,64.967) ; v1(102.174,75.201) 103.219,75.201 104.05,74.37 104.05,72.819 v1@104.95,71.919 ; v1(103.027,51.699) 103.677,51.699 104.666,52.688 104.666,52.737 106.731,54.802 ; v2(103.35,34.46) 103.35,37.11 104.5,38.261 104.5,50.45 107.792,53.741 ; v1(103.39,55.149) 104.25,55.149 105.317,56.216 ; v1(103.452,65.787) 103.452,63.487 105.152,61.787 105.152,61.224 106.731,59.646 ; v1(103.577,53.25) 104.472,53.25 106.378,55.155 ; 103.628,57.216 106.193,57.216 ; v2(104.55,35.36) 104.55,37.46 105.05,37.961 105.05,50.293 108.145,53.388 ; v1@104.95,69.919 105.251,69.619 105.251,65.718 104.6,65.067 104.6,64.217 105.901,62.917 105.901,61.183 107.085,59.999 ; 106.024,55.509 v1(107.352,56.837) ; v1(106.501,47.663) 106.501,50.329 108.852,52.68 ; 107.051,39.969 108.979,39.969 109.114,40.105 ; 107.051,44.969 108.958,44.969 109.001,45.012 ; 107.085,54.448 107.142,54.506 ; v1(107.451,63.767) 107.451,62.461 108.499,61.413 ; 107.752,53.737 107.787,53.737 ; 107.792,60.706 109.352,59.146 v1(109.352,59.137) ; v1(108.001,47.663) 108.001,51.122 109.206,52.327 ; 108.499,53.034 109.677,54.213 109.677,54.549 ; 108.852,61.767 110.102,60.517 110.102,60.451 ; 112.282,61.06 114.653,63.431 v1@114.653,65.437 ; 112.635,60.706 115.903,63.974 v1@115.903,64.517 ; v1(113.202,57.137) 114.016,57.137 115.11,58.231 ; 113.343,59.999 113.422,60.079 121.155,67.811 v2(121.155,68.418) ; 113.817,59.767 121.352,67.301 v1(122.174,67.301) ; v1(114.079,13.103) 114.129,13.153 114.129,32.308 v1(114.779,32.958) ; 114.757,58.585 115.772,59.6 115.879,59.6 ; v1(115.879,39.86) 115.879,36.259 v1(115.979,36.159) ; v1(116.853,37.51) 116.903,37.56 v1(116.903,43.662) ; v1(120.154,46.113) 120.424,45.842 120.424,34.08 120.304,33.96 ; v1(121.905,46.863) 121.874,46.833 121.874,34.99 122.855,34.01 ; v1(122.254,91.123) 122.504,90.873 124.831,90.873 126.008,92.049 126.353,92.395 128.031,92.395 v1(129.124,91.301) v1@129.074,91.251 ; v1(126.682,70.018) 126.032,69.367 126.032,67.167 127.732,65.466 127.732,53.013 125.732,51.013 125.732,37.759 127.532,35.959 127.532,34.209 128.182,33.558 v1@128.182,33.358 ; v1@128.474,100.001 v1(128.474,100.051) ; v1(128.624,79.551) 131.574,76.601 131.574,71.551 130.783,70.76 130.783,69.517 131.833,68.467 v1(131.833,67.917) ; v2(129.207,45.801) 129.657,45.351 129.657,34.36 129.157,33.86 129.157,31.809 130.307,30.659 130.307,21.805 130.307,21.329 v1(129.683,20.705) ; v1(130.574,79.151) 132.174,77.551 132.174,69.951 v1@132.024,69.801 ; 142.924,66.168 142.924,72.434 v1(143.01,72.519) ; 142.96,66.168 143.924,65.203 v1(143.924,64.867) 144.524,64.267 144.524,48.927 144.11,48.513 144.11,46.413 v1(143.76,46.063) ; v1@143.924,69.418 v1(143.924,73.701) ; v1(145.674,78.901) 145.724,78.851 145.724,76.051 145.924,75.851 v1@145.924,67.118 ; v1(146.774,76.351) 146.824,76.301 v1@146.824,66.118
  Bottom Layer w0.3: 92.197,40.861 92.197,85.823 92.597,86.223 v2(92.597,86.973) ; 92.197,41.011 92.197,29.358 v2(93.598,27.958) ; v1@92.497,102.727 92.174,102.404 92.174,93.751 93.39,92.536 93.774,92.151 93.774,91.151 v1@93.824,91.151 ; v1(92.574,90.051) 93.002,89.624 94.197,89.624 95.824,91.251 95.824,92.708 95.824,92.801 ; v2(93.298,85.072) 92.797,84.572 92.797,30.159 93.548,29.408 v2(94.898,29.408) ; v2(93.748,83.572) 93.398,83.222 93.398,36.76 v2(93.798,36.36) ; v1(94.698,98.876) 94.698,99.449 95.674,100.425 96.674,100.425 96.949,100.151 108.751,100.151 109.777,101.176 115.303,101.176 116.403,102.277 119.331,102.277 119.48,102.426 129.083,102.426 129.483,102.826 ; 95.425,48.436 95.948,47.913 97.198,47.913 97.799,48.513 97.799,49.463 97.449,49.814 97.449,50.614 95.748,52.314 95.748,61.567 97.749,63.567 97.749,64.417 101.2,67.868 101.2,71.719 v1(101.149,71.769) ; v1(95.425,50.449) 94.598,51.276 94.598,62.167 96.598,64.167 96.598,64.867 100.049,68.318 100.049,70.569 98.249,72.369 98.249,73.67 v1(99.049,74.47) ; v1@96.248,98.951 96.448,99.151 98.424,99.151 98.624,98.951 99.599,98.951 100.224,99.576 109.101,99.576 110.002,100.476 115.653,100.476 116.803,101.627 119.631,101.627 119.83,101.826 130.433,101.826 130.545,101.938 v1@130.583,101.976 ; 96.822,31.501 96.822,29.105 96.074,28.357 96.074,21.855 97.275,20.655 98.125,20.655 98.775,20.005 98.775,14.754 v1(98.725,14.704) ; v1@97.025,49.149 v1(96.825,48.949) 96.825,50.437 95.148,52.114 95.148,61.867 97.148,63.867 97.148,64.667 100.649,68.168 100.649,70.819 99.199,72.269 v1(99.199,73.069) ; v1@97.124,98.226 97.224,98.126 102.25,98.126 102.5,98.376 109.302,98.376 110.702,99.776 115.953,99.776 117.154,100.976 119.881,100.976 120.13,101.226 129.483,101.226 130.282,100.426 133.708,100.426 v1(134.058,100.776) ; v1(97.124,27.357) 97.825,26.657 v1(97.825,21.855) ; v1@97.376,59.651 97.376,52.8 98.126,52.05 98.126,50.099 98.776,49.449 v1(98.776,48.499) ; v1@99.175,100.125 99.175,100.127 v1(99.199,100.151) ; v1@99.702,63.687 99.702,56.237 100.902,55.037 100.902,54.237 ; v1(100.724,78.851) 100.424,78.551 100.424,73.644 101.099,72.969 102.05,72.969 103.35,71.669 103.35,70.519 v1(102.95,70.119) ; v1(101.374,76.251) 103.469,76.251 105,74.72 v1@105,73.319 ; v1(102.174,77.351) 103.169,77.351 105.874,74.646 105.874,64.891 v1(105.551,64.567) ; v1(102.174,79.151) 106.474,74.851 106.474,61.293 107.501,60.266 ; v1@102.5,71.069 101.8,70.369 101.8,67.618 100.749,66.568 100.749,65.217 102.13,63.837 102.302,63.837 104.652,61.487 104.652,61.017 104.96,60.71 106.378,59.292 ; v1(102.602,62.187) 103.152,62.187 104.102,61.237 104.102,60.86 106.024,58.938 ; v1(103.152,60.687) 103.569,60.687 105.67,58.585 ; v2(103.3,29.458) 103.35,29.408 v2(103.35,9.203) ; 103.576,57.286 103.612,57.25 ; v2(105,8.003) v2(105,27.558) ; v2(105.601,30.759) 105.651,30.709 v2@106.151,30.709 ; 105.67,55.862 104.045,54.237 100.902,54.237 ; v2(105.751,36.46) 106.151,36.06 106.151,7.103 v2(105.801,6.753) ; 106.176,57.25 107.213,58.286 108.115,58.286 109.027,57.375 109.027,56.391 107.142,54.506 ; v1(106.874,96.901) 107.274,97.301 110.324,97.301 112.851,94.774 113.201,94.774 116.202,91.773 117.752,91.773 118.052,92.073 122.731,92.073 123.331,91.473 124.681,91.473 126.017,92.808 126.132,92.923 129.555,92.923 131.628,90.851 v1(142.674,90.851) ; 107.438,54.095 104.08,50.737 102.402,50.737 100.902,52.237 100.902,54.237 ; v1@110.501,102.376 112.901,104.776 124.204,104.776 125.104,105.677 125.104,107.277 126.414,108.587 126.414,108.841 ; v1@110.557,73.575 110.557,75.332 ; 111.221,62.12 111.952,62.851 v1(111.952,63.787) 111.952,67.987 111.902,68.037 ; v1(111.478,98.775) 111.904,99.201 116.474,99.201 117.794,97.881 122.037,97.881 122.781,98.625 124.831,98.625 126.258,100.051 v1(128.474,100.051) ; v1(111.828,97.224) 113.529,97.224 113.729,97.024 114.729,97.024 116.329,95.424 117.18,95.424 118.13,96.374 119.18,96.374 119.73,95.824 123.131,95.824 123.381,96.074 124.971,96.074 125.647,95.398 126.172,94.874 133.721,94.874 134.673,95.825 v1(136.408,95.825) 135.57,96.663 135.57,98.119 ; v1@111.874,102.101 112.05,102.277 113.724,103.951 118.105,103.951 118.38,104.226 126.782,104.226 127.624,105.069 127.624,107.251 128.954,108.581 128.954,108.841 ; 111.928,61.413 113.702,63.187 v1@113.702,63.887 ; v1(112.678,20.405) 112.778,20.305 v1(112.778,18.054) ; v1(112.978,98.275) 113.229,98.525 116.179,98.525 117.303,97.401 122.507,97.401 123.181,98.075 125.282,98.075 125.782,98.575 ; 112.989,54.095 113.737,53.346 113.737,51.407 113.728,51.398 v1(113.728,51.248) ; v1@113.103,96.025 113.103,95.725 116.453,92.374 117.504,92.374 117.804,92.674 123.055,92.674 123.505,92.224 124.355,92.224 125.705,93.574 129.282,93.574 129.833,94.125 134.658,94.125 v1(135.258,94.725) ; v1@113.324,101.901 113.324,102.201 113.351,102.228 114.524,103.401 118.505,103.401 118.68,103.576 128.582,103.576 129.183,104.176 ; 113.696,59.646 113.817,59.767 ; 114.05,55.155 118.702,50.503 118.702,49.637 119.502,48.837 121.802,48.837 122.952,49.987 v1(122.952,50.287) ; 114.403,55.509 119.252,50.66 119.252,49.887 119.752,49.387 120.802,49.387 121.602,50.187 v1(121.602,50.337) ; 114.757,55.862 120.252,50.367 v1(120.252,50.337) ; v1(114.774,102.151) 115.474,102.851 118.855,102.851 118.98,102.976 128.799,102.976 129.185,103.362 129.574,103.751 133.374,103.751 135.274,105.651 135.274,107.601 134.034,108.841 ; v1(116.879,96.474) 116.896,96.491 117.28,96.874 119.58,96.874 119.903,96.551 123.058,96.551 123.381,96.874 v1@123.631,96.874 ; v1(116.952,93.373) 123.704,93.373 v1(123.904,93.173) ; v1(117.724,100.001) 117.949,100.225 v1(122.281,100.225) ; v1(117.752,94.374) 118.002,94.124 124.747,94.124 v1(124.974,94.351) ; v1@118.324,98.751 118.349,98.776 118.574,99.001 122.207,99.001 122.431,99.225 123.181,99.225 v1(123.581,99.625) ; v1@118.524,95.601 v1@118.574,95.551 ; v1@118.574,95.401 118.577,95.398 119.224,94.751 123.274,94.751 v1@123.774,95.251 ; 122.805,31.559 122.855,31.559 v2(122.855,27.208) ; 122.822,31.501 123.997,31.501 124.505,32.009 124.505,35.96 123.224,37.241 v1(123.224,48.101) v1@123.324,48.001 ; 123.079,74.25 123.079,74.248 123.079,72.228 123.118,72.189 123.124,72.195 ; 123.079,76.75 123.079,78.862 123.081,78.864 ; v1(123.105,66.318) 125.181,66.318 126.056,65.442 126.056,64.167 125.606,63.717 125.606,51.713 125.511,51.619 125.232,51.339 125.232,37.509 125.832,36.909 ; v1(123.155,88.173) 123.305,88.323 127.856,88.323 130.607,85.573 132.007,85.573 133.708,87.273 151.062,87.273 152.362,85.973 159.164,85.973 159.564,85.573 160.264,85.573 161.315,86.623 ; v1(123.524,83.551) 124.324,83.551 124.724,83.151 124.724,80.851 125.824,79.751 v1(125.824,79.151) ; v1(123.824,65.051) 123.824,64.501 124.424,63.901 124.424,55.701 123.624,54.901 123.624,53.701 124.424,52.901 124.424,51.985 124.272,51.832 124.272,43.985 124.272,37.094 124.424,36.941 125.006,36.36 v2(125.006,30.009) ; v1(124.374,89.951) 124.633,89.951 126.398,91.716 127.562,91.716 128.155,91.123 128.155,90.621 128.992,89.784 129.524,89.251 141.074,89.251 141.774,88.551 151.574,88.551 152.474,87.651 v1(169.324,87.651) ; v1(125.156,64.967) 124.974,64.786 124.974,51.856 124.752,51.633 124.752,37.293 125.485,36.559 125.485,33.98 125.806,33.659 ; v1(125.582,20.255) 126.805,21.478 126.805,32.658 125.854,33.608 ; 125.79,98.567 126.024,98.801 v1(127.824,98.801) ; 125.811,33.665 125.861,33.615 ; 125.823,36.9 125.965,36.758 125.965,34.45 127.406,33.009 127.406,19.606 v2(126.756,18.956) ; 126.021,83.848 126.075,83.795 126.075,81.943 ; 126.075,74.901 126.075,76.943 ; v1(126.605,89.322) 127.753,89.322 130.924,86.151 131.757,86.151 ; v1@126.905,90.873 127.053,90.873 129.374,88.551 129.824,88.551 v1(131.324,87.051) ; v1(126.932,68.567) 126.932,66.967 128.282,65.616 128.282,50.263 128.782,49.762 128.782,48.712 128.132,48.062 128.132,44.561 128.532,44.161 128.532,34.859 v1(128.482,34.809) ; v1(127.932,72.918) 127.856,72.842 127.856,66.916 130.005,64.766 130.005,62.166 130.824,61.347 130.824,52.11 130.677,51.963 130.677,50.715 130.824,50.568 130.824,33.701 130.424,33.301 130.424,32.451 131.524,31.351 131.524,8.501 130.274,7.251 v1(130.274,5.301) ; v1(128.032,74.519) 128.882,73.669 128.882,72.444 128.406,71.968 128.406,67.218 130.657,64.967 130.657,62.517 131.357,61.817 131.357,51.964 131.157,51.764 131.157,50.914 131.357,50.714 v1(131.357,32.909) ; v1(128.574,78.151) 128.574,77.477 130.583,75.469 130.583,71.868 130.083,71.368 130.083,68.717 v1(130.533,68.267) ; 129.191,104.168 129.374,104.351 131.774,104.351 132.724,105.301 132.724,107.611 131.494,108.841 ; v1(129.274,58.451) 129.274,58.051 130.274,57.051 130.274,52.239 130.197,52.162 130.197,50.516 130.274,50.439 130.274,34.001 129.824,33.551 129.824,32.101 130.924,31.001 130.924,17.723 v2(130.507,17.305) ; 129.494,102.814 129.857,103.177 135.158,103.177 v1(135.608,102.727) ; 131.774,86.151 131.757,86.151 ; v1(132.374,80.601) 133.674,79.301 133.674,69.051 133.949,68.776 v1@134.074,68.651 ; 132.77,98.119 132.77,96.663 v1(133.258,96.175) ; v1(134.924,76.451) 134.274,75.801 134.274,70.151 135.024,69.401 135.024,66.201 135.524,65.701 135.524,53.431 135.058,52.964 135.058,52.214 135.524,51.748 135.524,46.451 136.174,45.801 v1@136.174,32.709 ; v1(135.934,20.382) 136.558,21.006 136.558,22.707 135.958,23.307 135.958,30.359 v1(136.508,30.909) ; v1@138.274,59.801 138.174,59.901 138.174,72.551 143.074,77.451 v1(144.024,77.451) ; 139.959,61.316 139.959,62.567 140.836,63.443 v1@140.836,71.768 ; v1@139.974,33.501 139.974,33.81 139.974,61.901 ; 140.324,97.251 140.424,97.151 ; v1@141.76,31.259 141.224,31.794 141.224,44.977 142.81,46.563 142.81,48.199 143.874,49.263 143.874,59.902 v1@142.96,60.816 ; v1(141.86,58.266) 141.91,58.316 v1(141.91,63.717) ; v1(142.474,75.501) 142.074,75.101 142.074,65.503 142.924,64.653 v1@142.924,60.816 ; v1(143.91,69.418) v1@143.91,69.454 ; v1@144.861,68.218 v1(144.911,68.218) v1(144.911,72.669) ; v1(147.711,78.921) 149.024,77.608 149.024,65.701 149.574,65.151 149.574,51.127 147.311,48.863 147.311,32.014 v1(147.724,31.601) ; 153.672,27.054 154.772,27.054 ; v1(159.924,86.551) 152.634,86.551 151.312,87.873 133.479,87.873 131.757,86.151 ; 160.827,86.135 161.315,86.623 ; v1(164.274,46.601) v1@164.374,46.501 ; v1(164.368,36.645) v1@164.374,36.651 ; 166.542,85.422 166.421,85.422 165.22,86.623 162.841,86.623 161.315,86.623